# Altium PCB multlayer.PcbDoc
Units mil, origin at the board's own origin, x right, y up, seen from the top; angles counter-clockwise.
Board outline 3500 x 1750 mil, 4 copper layers (Top Layer, Layer 1, Layer 2, Bottom Layer), stack 23.756 mil thick; 14 components, 10 nets, 50 pads, 0 vias.
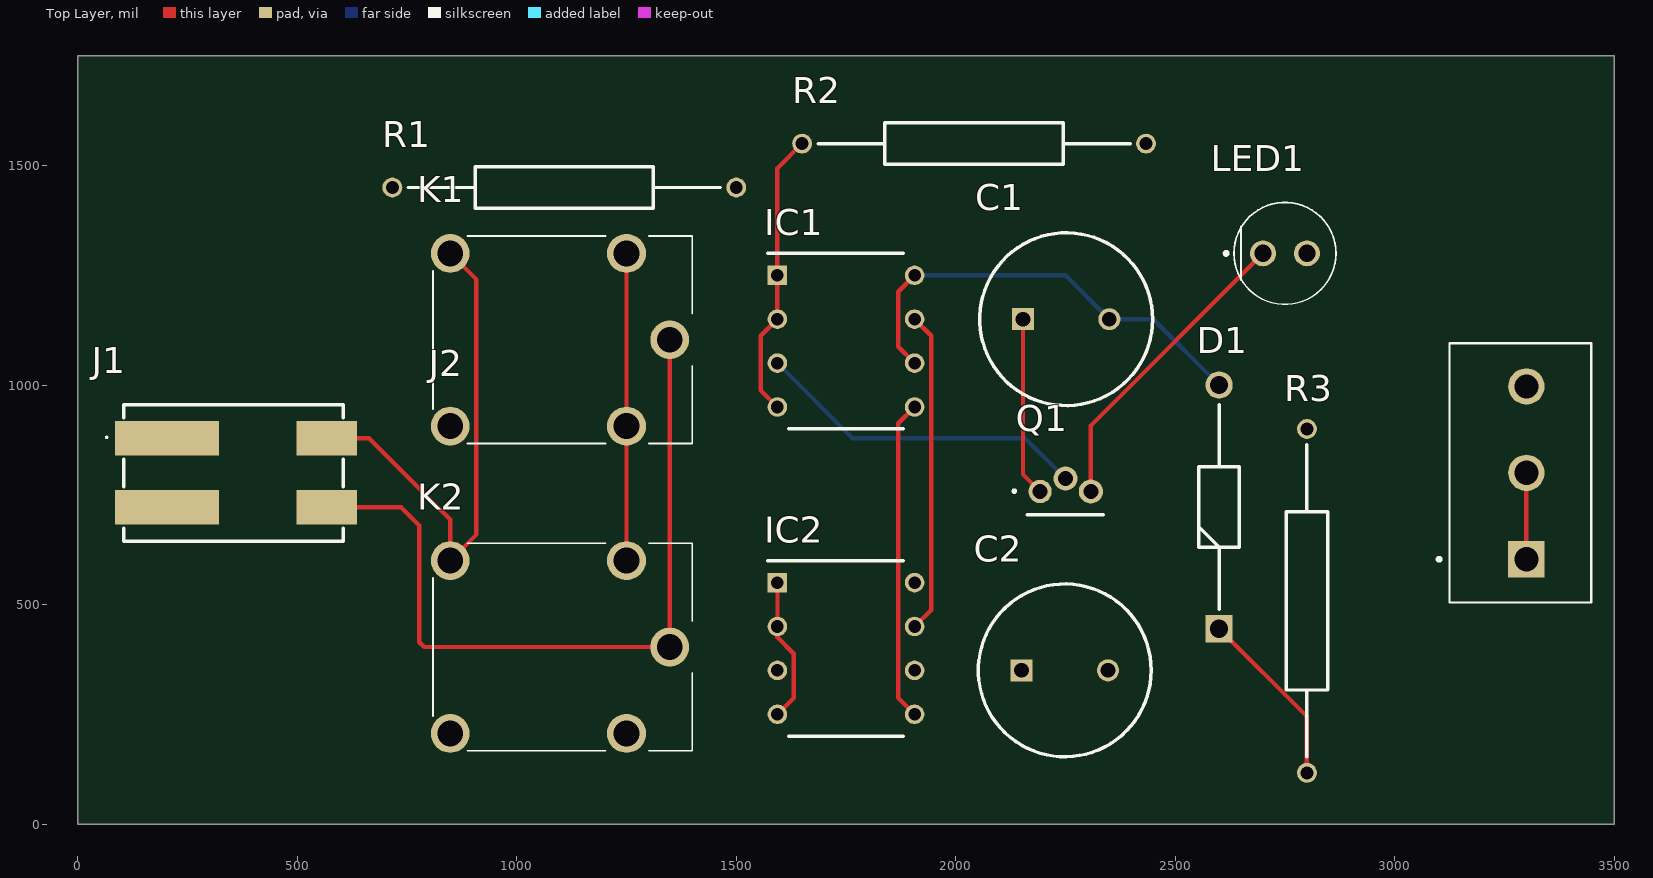
[diagram p0: Top Layer view]
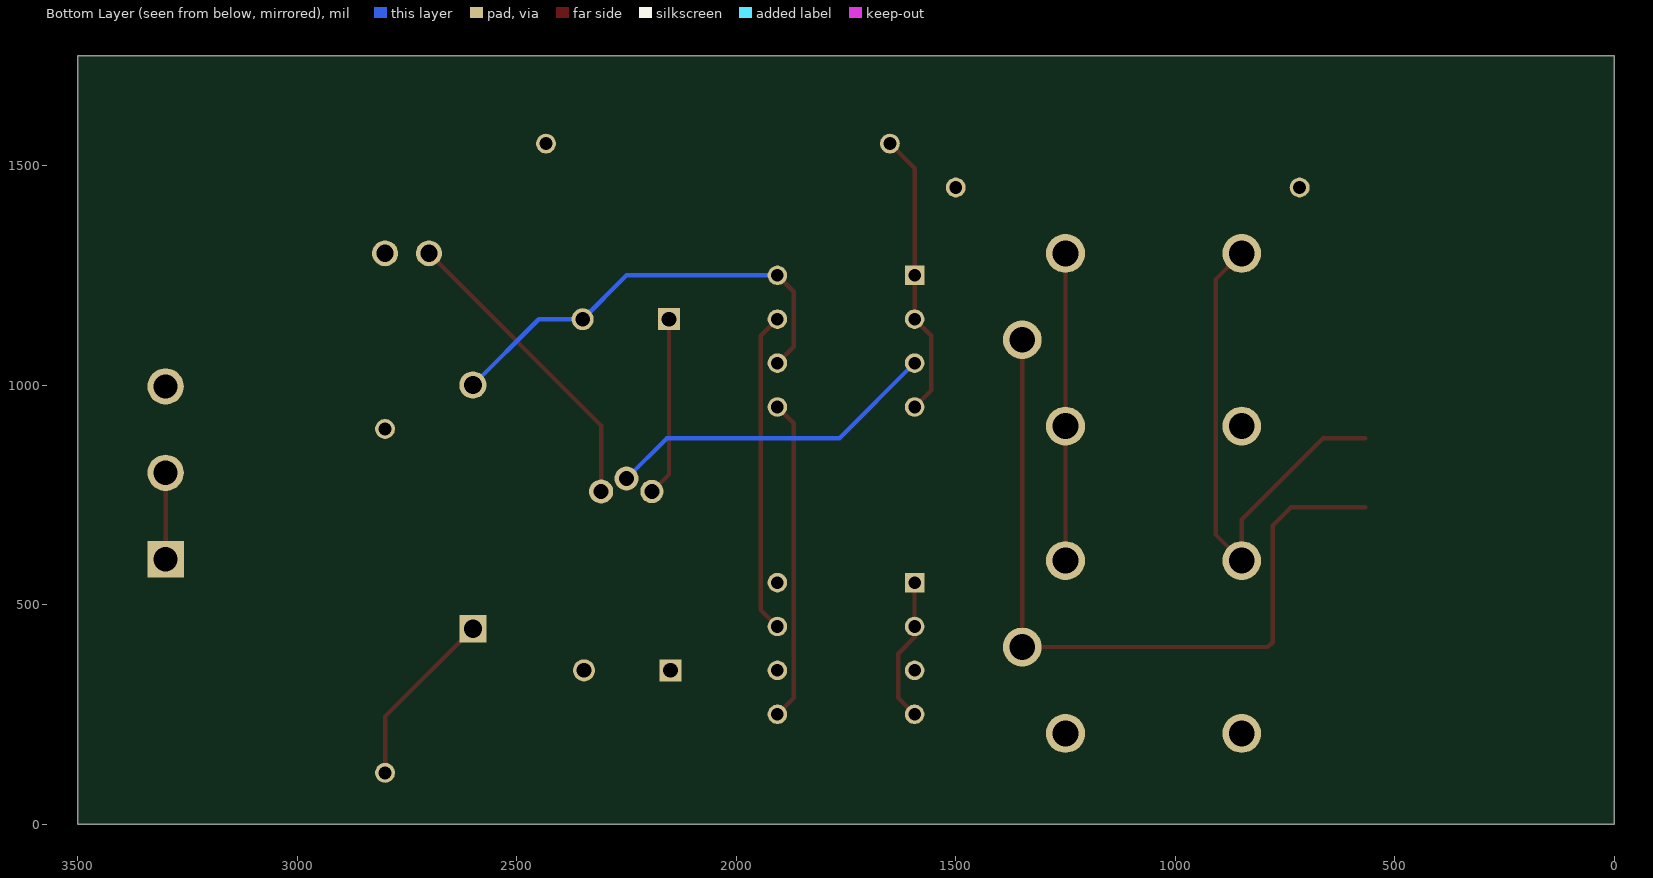
[diagram p1: Bottom Layer view, seen from below]
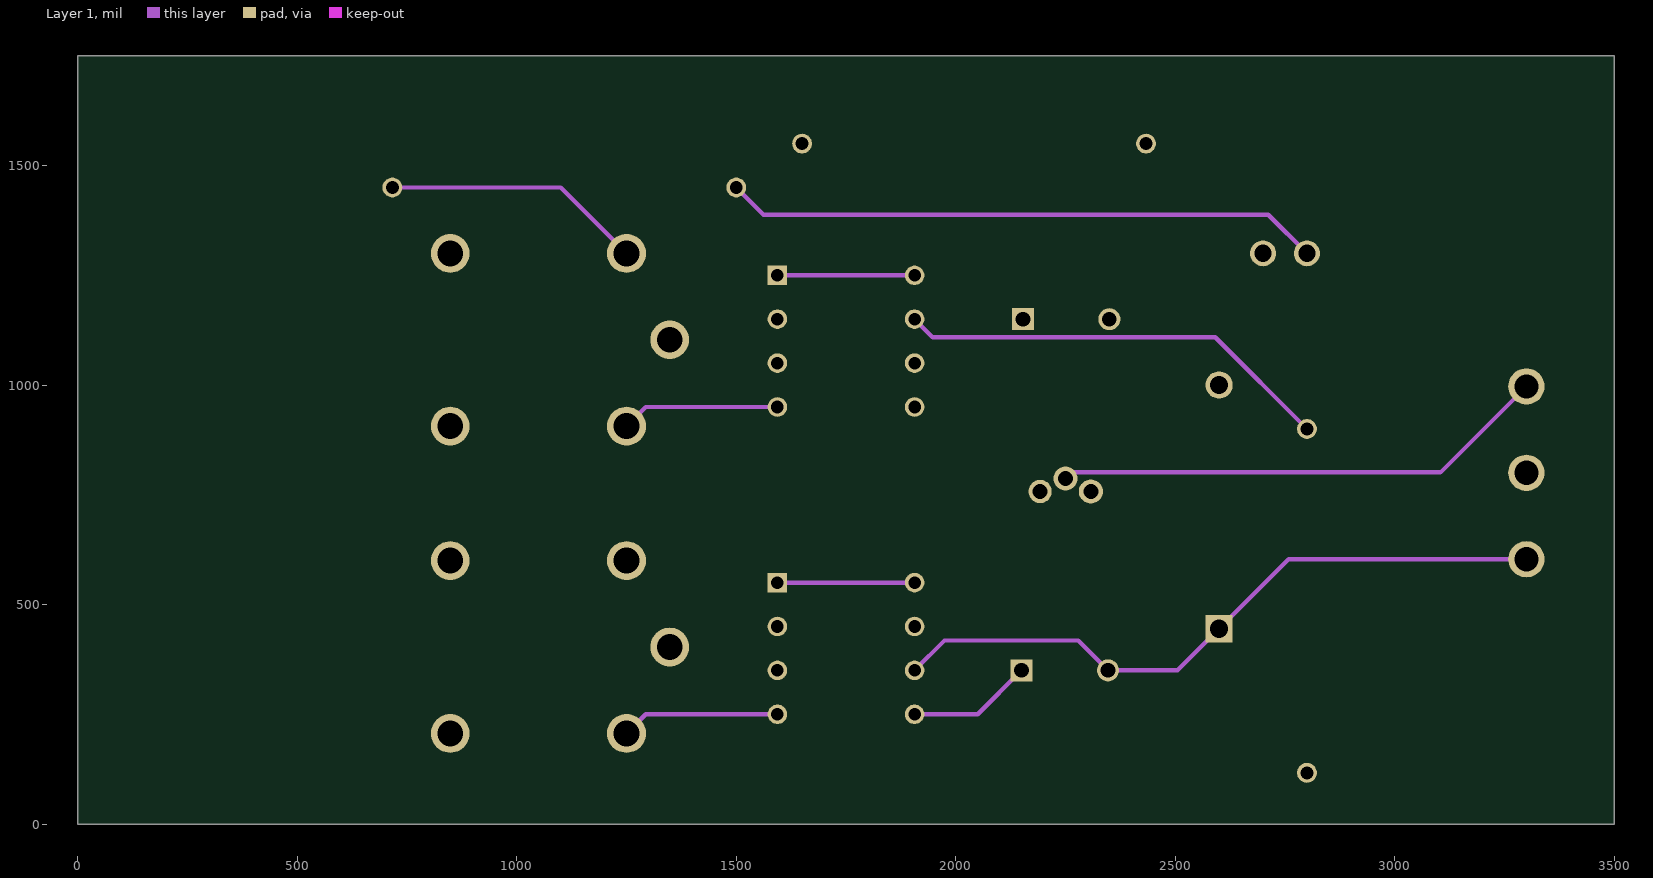
[diagram p2: Layer 1]
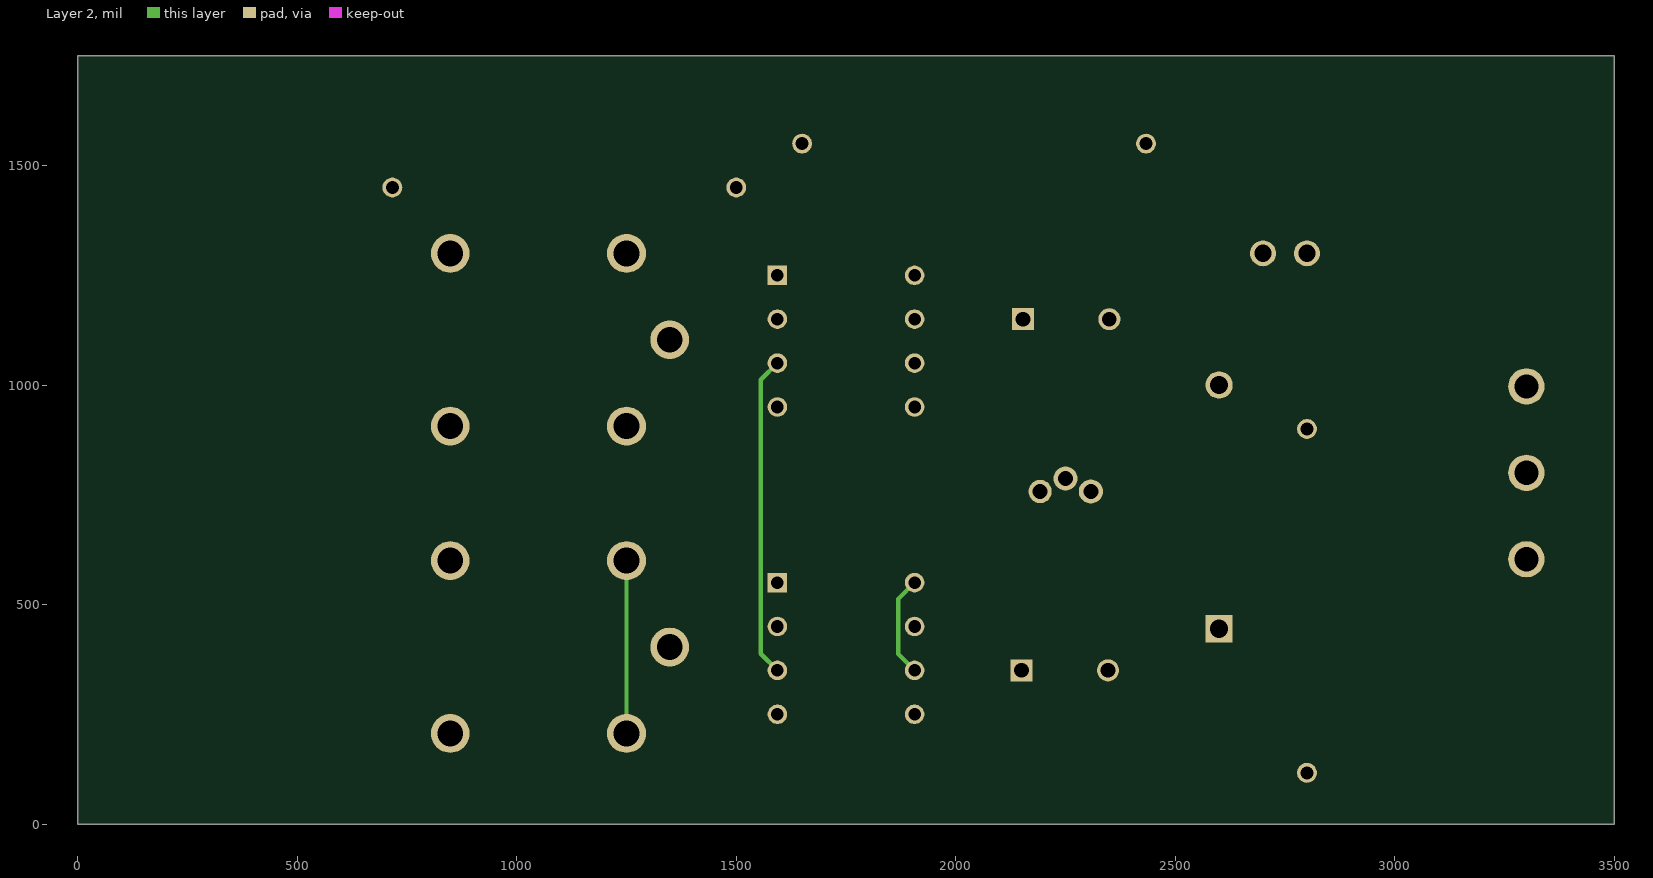
[diagram p3: Layer 2]
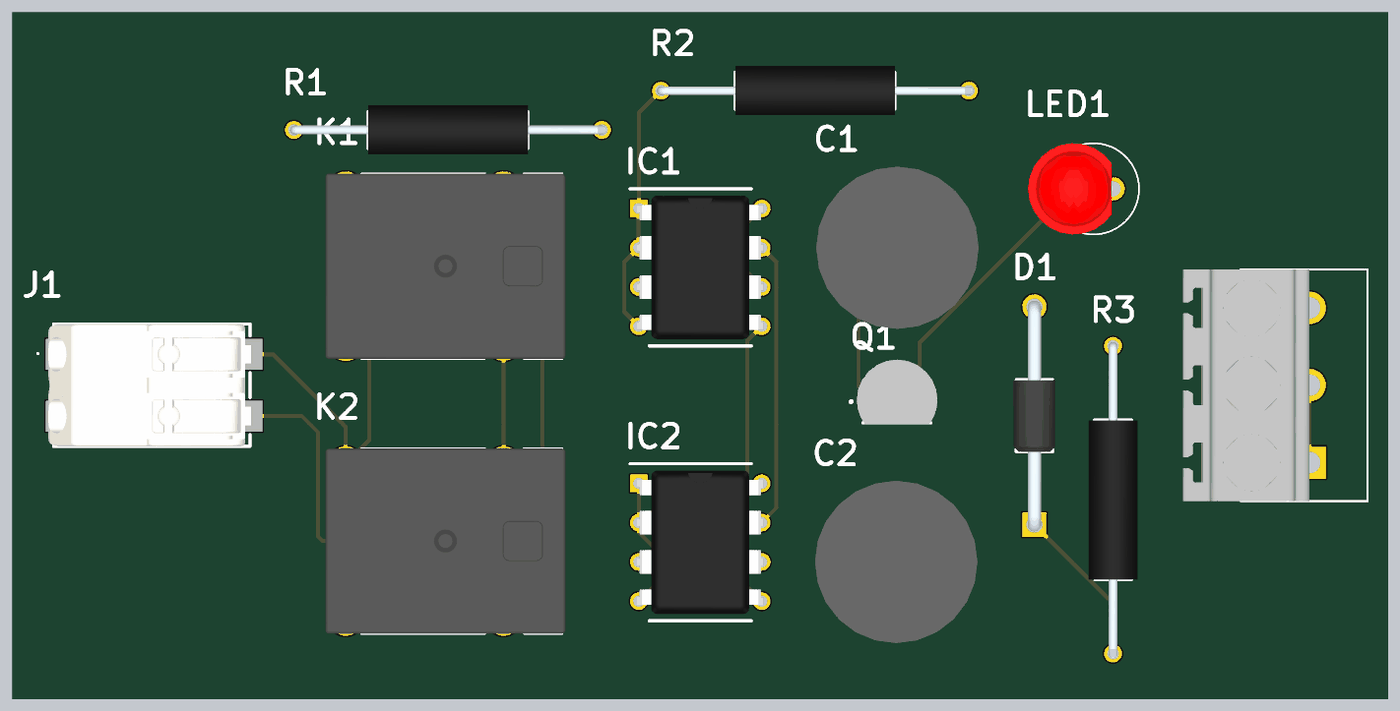
[diagram p4: 3D render of the assembled board from above, using the file's embedded part models]

## Layer stack, top to bottom
Top Solder: solder mask 0.4, Solder Resist, Dk 3.5
Top Layer: signal copper 1.4
Dielectric 2: prepreg 2.8, PP-006, Dk 4.1
Layer 1: signal copper 1.378
Dielectric 1: dielectric 12.6, FR-4, Dk 4.8
Layer 2: signal copper 1.378
Dielectric 3: prepreg 2.8, PP-006, Dk 4.1
Bottom Layer: signal copper 1.4
Bottom Solder: solder mask 0.4, Solder Resist, Dk 3.5

## Board outline
0,0 3500,0 3500,1750 0,1750

## Design rules (kind name [scope] priority, off if disabled: settings)
Clearance [All] p1: gap=10 ignorepadtopadclearanceinfootprint=FALSE except(0: Arc-Hole Track-Hole SMDPad-Hole THPad-Hole Via-Hole Fill-Hole Poly-Hole Region-Hole Text-Hole)
PolygonConnect [All] p1: connectstyle=Relief reliefconductorwidth=10 reliefentries=4 polygonreliefangle="90 Angle" airgapwidth=10
RoutingVias [All] p1: holewidth=28 width=50 viastyle="Through Hole" minholewidth=28 minwidth=50 maxholewidth=28 maxwidth=50
SolderMaskExpansion [All] p1: expansion=4 istentingtop=FALSE
Width [All] p1: maxlimit=10 minlimit=10 preferedwidth=10
30 further rules are at their usual default settings.

## Components (designator, comment, footprint, x,y, rotation, side; value= is the part's Value field where it differs from the comment)
C1 "100uf" CAPPRD500W65D1000H3200 2153.15,1150 r0 top
C2 "100uf" CAPPRD500W65D1000H3200 2150,350 r0 top
D1 "1N4007-E3_73" DIOAD1405W86L465D235 2600,444.88 r90 top
IC1 "LM555CN_NOPB" DIP794W53P254L959H508Q8N 1750,1100 r0 top
IC2 "LM555CN_NOPB" DIP794W53P254L959H508Q8N 1750,400 r0 top
J1 "2060-452_998-404" 2060452998404 350,800 r0 top
J2 "1776118-3" TE_1776118-3 3300,800 r90 top
K1 "JJM1-12V" JJM112V 1250,1300 r180 top
K2 "JJM1-12V" JJM112V 1250,600 r180 top
LED1 "151051RS11000" 151051RS11000 2700,1300 r0 top
Q1 "2N4401" CS_TO-92 2250,850 r0 top
R1 "470ohm" RESAD1987W56L1031D239 1500,1450 r180 top
R2 "1k" RESAD1987W56L1031D239 2433.46,1550 r180 top
R3 "4.7k" RESAD1987W56L1031D239 2800,116.54 r90 top

## Footprints (in the part's own frame and the unit in brackets; to place one, negate y for a bottom-side part, rotate by r counter-clockwise, add the part's x,y. Pads: shape width x height; smd on the part's side, far side on the other; paste and mask are expansions set on the pad)
151051RS11000 [mm]
  round 1.5 hole 1: 1(0,0) 2(2.54,0)
  silkscreen extent -2.23,-2.95 4.22,2.95, body extent -2.95,-2.95 2.45,2.95, height 8.7
2060452998404 [mm]
  rect 6x2 smd: 1(-3.725,2) 3(-3.725,-2)
  rect 3.5x2 smd: 2(5.525,2) 4(5.525,-2)
  silkscreen extent -7.27,-3.95 6.48,3.95, body extent -6.55,-3.95 6.55,3.95, height 4.5
CAPPRD500W65D1000H3200 [mm]
  rect 1.275x1.275 hole 0.85: 1(0,0)
  round 1.275 hole 0.85: 2(5,0)
  silkscreen extent -2.5,-5 7.5,5, body extent -2.73,-5.25 7.75,5.25, height 32
CS_TO-92 [mm]
  round 1.35 hole 0.88: 1(-1.47,-2.35)
  round 1.4 hole 0.88: 2(0,-1.6) 3(1.47,-2.35)
  silkscreen extent -3.02,-3.7 2.2,-2.27, body extent -2.59,-3.81 2.63,0.37, height 5.56
DIOAD1405W86L465D235 [mm]
  rect 1.575x1.575 hole 1.05: 1(0,0)
  round 1.575 hole 1.05: 2(14.1,0)
  silkscreen extent 1.14,-1.18 12.96,1.18, body extent -0.43,-1.34 14.48,1.34, height 2.7
DIP794W53P254L959H508Q8N [mm]
  rect 1.13x1.13 hole 0.73: 1(-3.97,3.81)
  round 1.13 hole 0.73: 2(-3.97,1.27) 3(-3.97,-1.27) 4(-3.97,-3.81) 5(3.97,-3.81) 6(3.97,-1.27) 7(3.97,1.27) 8(3.97,3.81)
  silkscreen extent -4.54,-5.08 3.3,5.08, body extent -4.1,-4.64 4.1,4.64, height 4.21
JJM112V [mm]
  round 2.25 hole 1.5: 1(0,0) 2(10.2,0) 3(10.2,10) 4(0,10) 5(-2.5,5)
  silkscreen extent -3.8,-1 11.2,11, body extent -3.99,-1 11.51,11, height 12.82
RESAD1987W56L1031D239 [mm]
  round 1.15 hole 0.75: 1(0,0) 2(19.9,0)
  silkscreen extent 0.93,-1.2 18.98,1.2, body extent -0.28,-1.58 20.15,1.58, height 3.18
TE_1776118-3 [mm]
  rect 2.1x2.1 / inner round 2.1 / far side rect 2.1x2.1 hole 1.4: 1(-5,0)
  round 2.1 hole 1.4: 2(0,0) 3(5,0)
  silkscreen extent -7.5,-3.75 7.5,5.15, body extent -7.5,0 7.5,8.2, height 7.15

## Part data
C1 C2: library part EEU-FC2A101L, "Capacitor Polarised", Manufacturer_Name=Panasonic, Mouser Part Number=667-EEU-FC2A101L, Arrow Part Number=EEU-FC2A101L, Arrow Price/Stock=https://www.arrow.com/en/products/eeu-fc2a101l/panasonic?region=nac, Datasheet Link=http://industrial.panasonic.com/cdbs/www-data/pdf/RDF0000/ABA0000C1209.pdf, Height=32mm, Manufacturer_Part_Number=EEU-FC2A101L, Mouser Price/Stock=https://www.mouser.co.uk/ProductDetail/Panasonic/EEU-FC2A101L?qs=MtOUKumLmnYYrYsMGpDvcw%3D%3D
D1: "Diode", Arrow Part Number=1N4007-E3/73, Manufacturer_Name=Vishay, Mouser Part Number=625-1N4007-E3/73, Arrow Price/Stock=https://www.arrow.com/en/products/1n4007-e373/vishay?region=europe, Datasheet Link=https://mouser.componentsearchengine.com/Datasheets/2/1N4007-E3_73.pdf, Manufacturer_Part_Number=1N4007-E3/73, Mouser Price/Stock=https://www.mouser.co.uk/ProductDetail/Vishay-General-Semiconductor/1N4007-E3-73?qs=N4vtoAxH%2FSqT3Ng3e4K0Gw%3D%3D
IC1 IC2: "Integrated Circuit", Arrow Part Number=LM555CN/NOPB, Manufacturer_Name="Texas Instruments", Mouser Part Number=926-LM555CN/NOPB, Arrow Price/Stock=https://www.arrow.com/en/products/lm555cnnopb/texas-instruments?region=nac, Datasheet Link=https://datasheet.datasheetarchive.com/originals/distributors/Datasheets-SFU2/DSASFU100035550.pdf, Height=5.08mm, Manufacturer_Part_Number=LM555CN/NOPB, Mouser Price/Stock=https://www.mouser.co.uk/ProductDetail/Texas-Instruments/LM555CN-NOPB?qs=QbsRYf82W3GjZpQL%2FakZOg%3D%3D
J1: "Connector", Arrow Part Number=2060-452/998-404, Manufacturer_Name=Wago, Arrow Price/Stock=https://www.arrow.com/en/products/2060-452998-404/wago-kontakttechnik-gmbh?region=nac, Datasheet Link=https://www.wago.com/2060-452/998-404, Height=4.5mm, Manufacturer_Part_Number=2060-452/998-404
J2: "Conn Terminal Block F 3 POS 5mm Solder ST Thru-Hole Package", Package=None, Availability="In Stock", Check_prices=https://www.snapeda.com/parts/1776118-3/TE+Connectivity+AMP+Connectors/view-part/?ref=eda, EU_RoHS_Compliance="Compliant with Exemptions", MF="TE Connectivity", MP=1776118-3, Price=None, Purchase-URL=https://pricing.snapeda.com/search/part/1776118-3/?ref=eda, SnapEDA_Link=https://www.snapeda.com/parts/1776118-3/TE+Connectivity+AMP+Connectors/view-part/?ref=snap
K1 K2: "Relay or Contactor", Manufacturer_Name=Panasonic, Mouser Part Number=769-JJM1-12V, Arrow Part Number=JJM1-12V, Arrow Price/Stock=https://www.arrow.com/en/products/jjm1-12v/panasonic?region=nac, Datasheet Link=https://www.panasonic-electric-works.com/cps/rde/xbcr/pew_eu_en/ds_61210_en_jjm.pdf, Height=14.2mm, Manufacturer_Part_Number=JJM1-12V, Mouser Price/Stock=https://www.mouser.co.uk/ProductDetail/Panasonic-Industrial-Devices/JJM1-12V?qs=UO%2Fx91QLkSB08I34A9%2FECg%3D%3D
LED1: "LED", Manufacturer_Name="Wurth Elektronik", Mouser Part Number=710-151051RS11000, Datasheet Link=https://katalog.we-online.com/led/datasheet/151051RS11000.pdf, Height=13.6mm, Manufacturer_Part_Number=151051RS11000, Mouser Price/Stock=https://www.mouser.co.uk/ProductDetail/Wurth-Elektronik/151051RS11000?qs=LlUlMxKIyB0NuMCRBgVmEg%3D%3D
Q1: "Transistor BJT NPN", Manufacturer_Name="Central Semiconductor", Mouser Part Number=610-2N4401, Datasheet Link=https://my.centralsemi.com/get_document.php?cmp=1&mergetype=pd&mergepath=pd&pdf_id=2N4400.PDF, Manufacturer_Part_Number=2N4401, Mouser Price/Stock=https://www.mouser.com/Search/Refine.aspx?Keyword=610-2N4401
R1 R2 R3: library part RS01A1R000FE12, "Resistor", Manufacturer_Name=Vishay, Mouser Part Number=71-RS01A1R000FE12, Arrow Part Number=RS01A1R000FE12, Arrow Price/Stock=https://www.arrow.com/en/products/rs01a1r000fe12/vishay?region=nac, Datasheet Link=http://www.mouser.com/ds/2/427/rsns-226497.pdf, Manufacturer_Part_Number=RS01A1R000FE12, Mouser Price/Stock=https://www.mouser.co.uk/ProductDetail/Vishay-Dale/RS01A1R000FE12?qs=pX8%252BLszEE6SqU%2F4VU%252B6gEw%3D%3D

## Nets (pads, with @x,y where several pads share a name; then routed paths per layer and width w, separated by ;. In a path a pad name is that pad's centre, name@x,y a point inside that pad or via, vN(x,y) a via of type N, cw(c..) or ccw(c..) an arc to the next point about the centre after c; other vN are vias at no path point)
GND: C1.2 C2.2 D1.1 D1.2 IC1.1 IC1.2 IC1.4 IC1.6 IC1.8 IC2.1 IC2.2 IC2.4 IC2.6 IC2.8 J2.1 J2.2 K1.1 K1.4 K2.1 K2.4 R1.2 R2.2 R3.1 | length 7446.4
  Top Layer w10: K2.1 K1.4 K1.1 ; IC2.4 1631,287.3 1631,388 1593.7,425.3 IC2.2 1594,450.3 1594,549.7 IC2.1 ; IC1.4 1556,987.7 1556,1112.3 IC1.2 1593,1150.7 1593,1249.3 IC1.1 1593.7,1493.7 R2.2 ; IC1.6 1869,1087.3 1869,1212.7 IC1.8 ; D1.1 2800,244.88 R3.1 ; J2.1 J2.2
  Layer 1 w10: R1.2 1100,1450 K1.1 ; K2.4 1293.7,250 IC2.4 ; K1.4 1293.7,950 IC1.4 ; IC2.1 IC2.8 ; IC1.1 IC1.8 ; IC2.6 1974.3,418 2278.85,418 C2.2 2505.12,350 D1.1 2758.27,603.15 J2.1
  Layer 2 w10: K2.4 K2.1 ; IC2.6 1869,387.3 1869,512.7 IC2.8
  Bottom Layer w10: IC1.8 2250,1250 C1.2 2450,1150 D1.2
NetC1_1: C1.1 Q1.1 | length 408.7
  Top Layer w10: C1.1 2153.15,796.46 Q1.1
NetC2_1: C2.1 IC1.5 IC2.5 | length 1016
  Top Layer w10: IC2.5 1869,287.3 1869,912.7 IC1.5
  Layer 1 w10: IC2.5 2050,250 C2.1
NetIC1_3: IC1.3 IC2.3 J2.3 Q1.2 | length 2641.6
  Layer 1 w10: Q1.2 2265,787.01 2265,801 3104.15,801 J2.3
  Layer 2 w10: IC2.3 1556,387.7 1556,1012.3 IC1.3
  Bottom Layer w10: IC1.3 1764.7,879 2158.01,879 Q1.2
NetIC1_7: IC1.7 IC2.7 R3.2 | length 1728.5
  Top Layer w10: IC2.7 1944,487.7 1944,1112.3 IC1.7
  Layer 1 w10: IC1.7 1947.3,1109 2591,1109 R3.2
NetJ1_2: J1.2 K1.2 K2.2 | length 1200.5
  Top Layer w10: J1.2 663.26,878.74 848.43,693.57 K2.2 908,659.57 908,1240.43 K1.2
NetJ1_4: J1.4 K1.5 K2.5 | length 1768.4
  Top Layer w10: J1.4 736.74,721.26 778,680 778,414.15 789,403.15 K2.5 K1.5
NetLED1_1: LED1.1 Q1.3 | length 704.9
  Top Layer w10: Q1.3 2307.87,907.87 LED1.1
NetLED1_2: LED1.2 R1.1 | length 1362.1
  Layer 1 w10: R1.1 1562,1388 2712,1388 LED1.2
NetR2_1: R2.1
pads on no net: J1.1 J1.3 K1.3 K2.3